# Altium PCB PCB1.PcbDoc
Units mil, origin at the board's own origin, x right, y up, seen from the top; angles counter-clockwise.
Board outline 2094 x 1900 mil, 2 copper layers (Top Layer, Bottom Layer), stack 60.4 mil thick; 17 components, 15 nets, 79 pads, 9 vias.
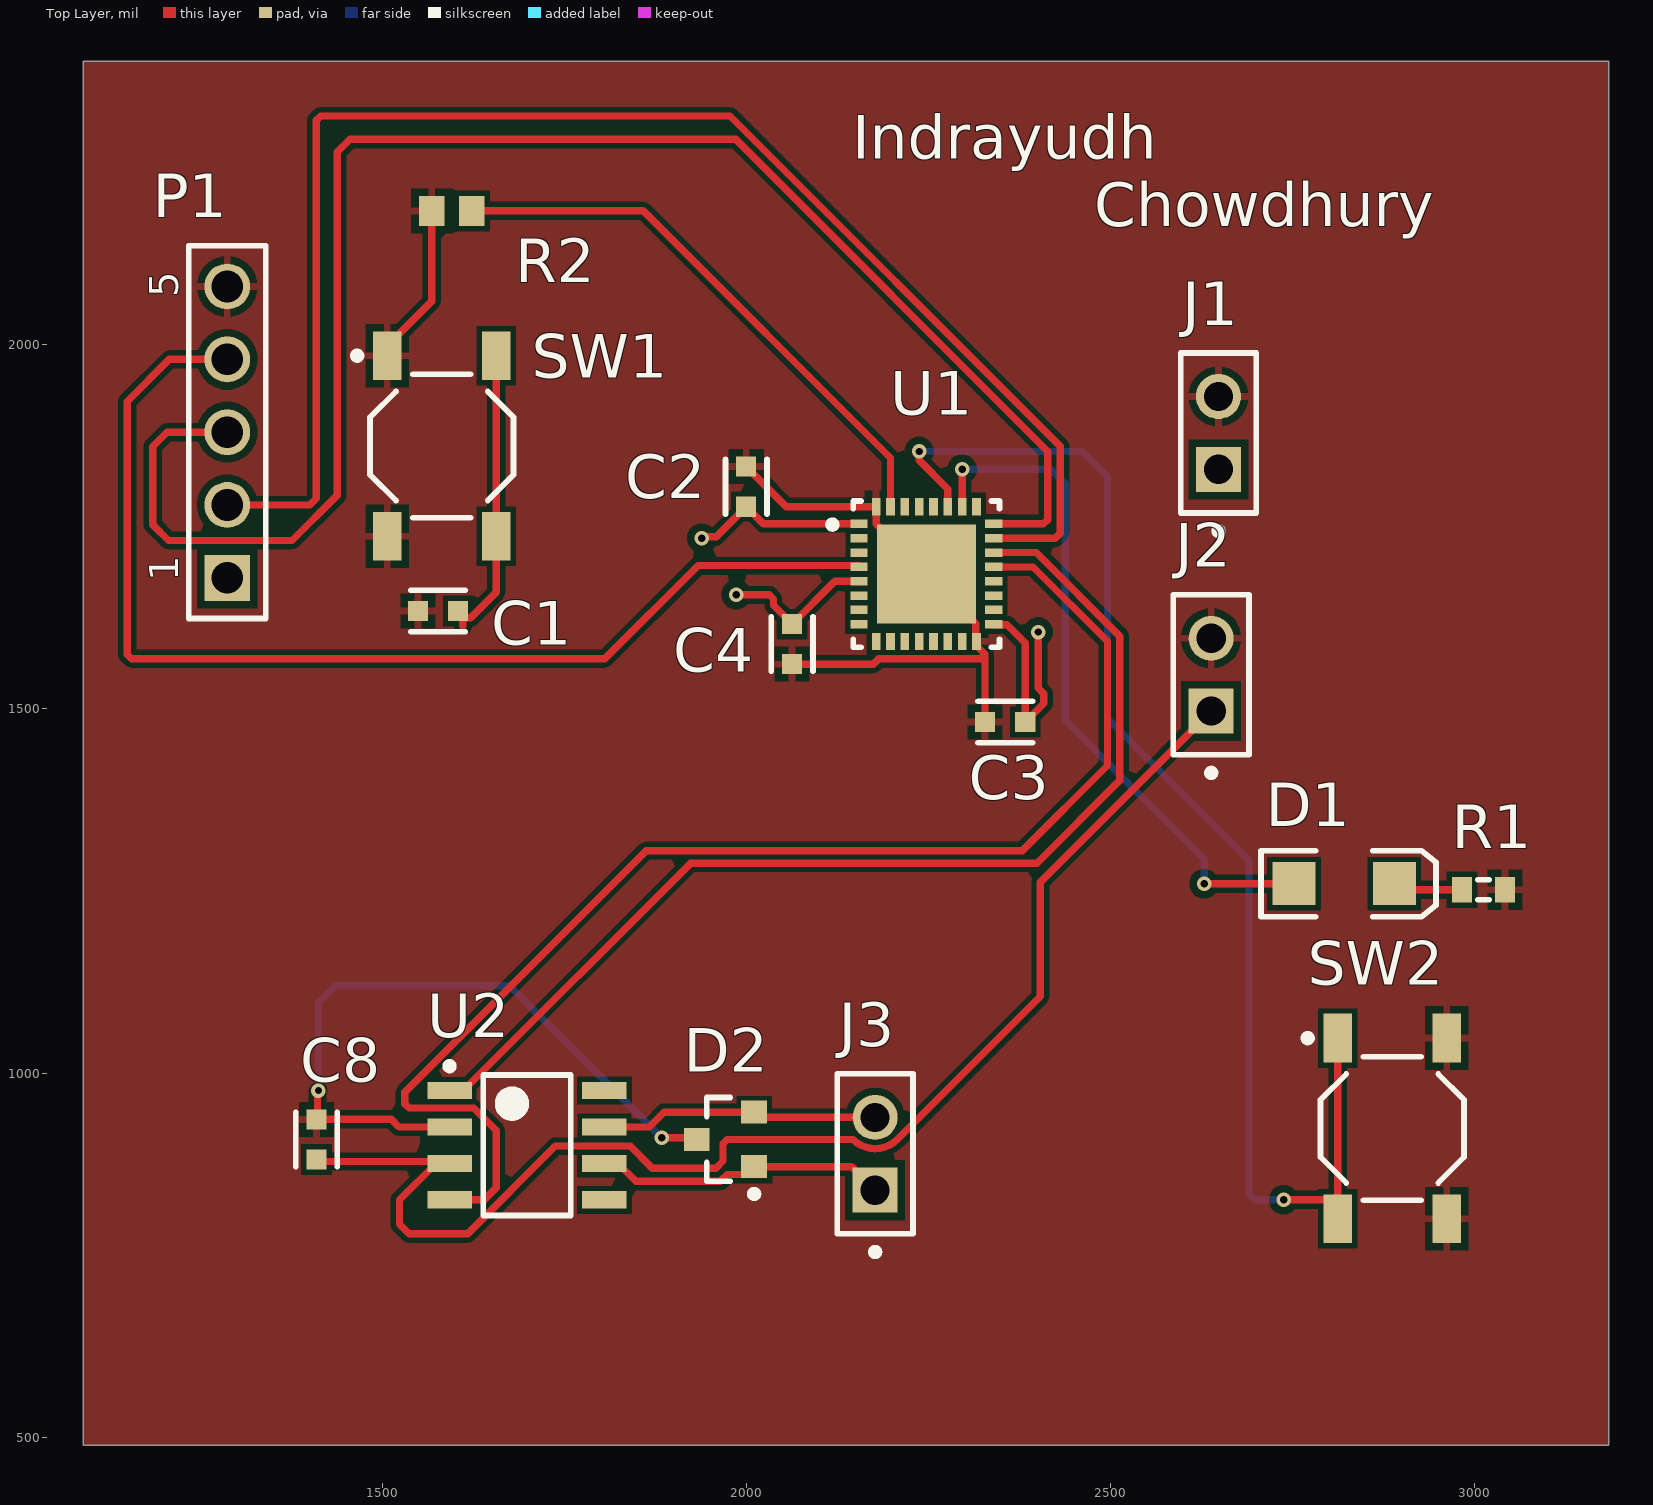
[diagram p0: Top Layer view]
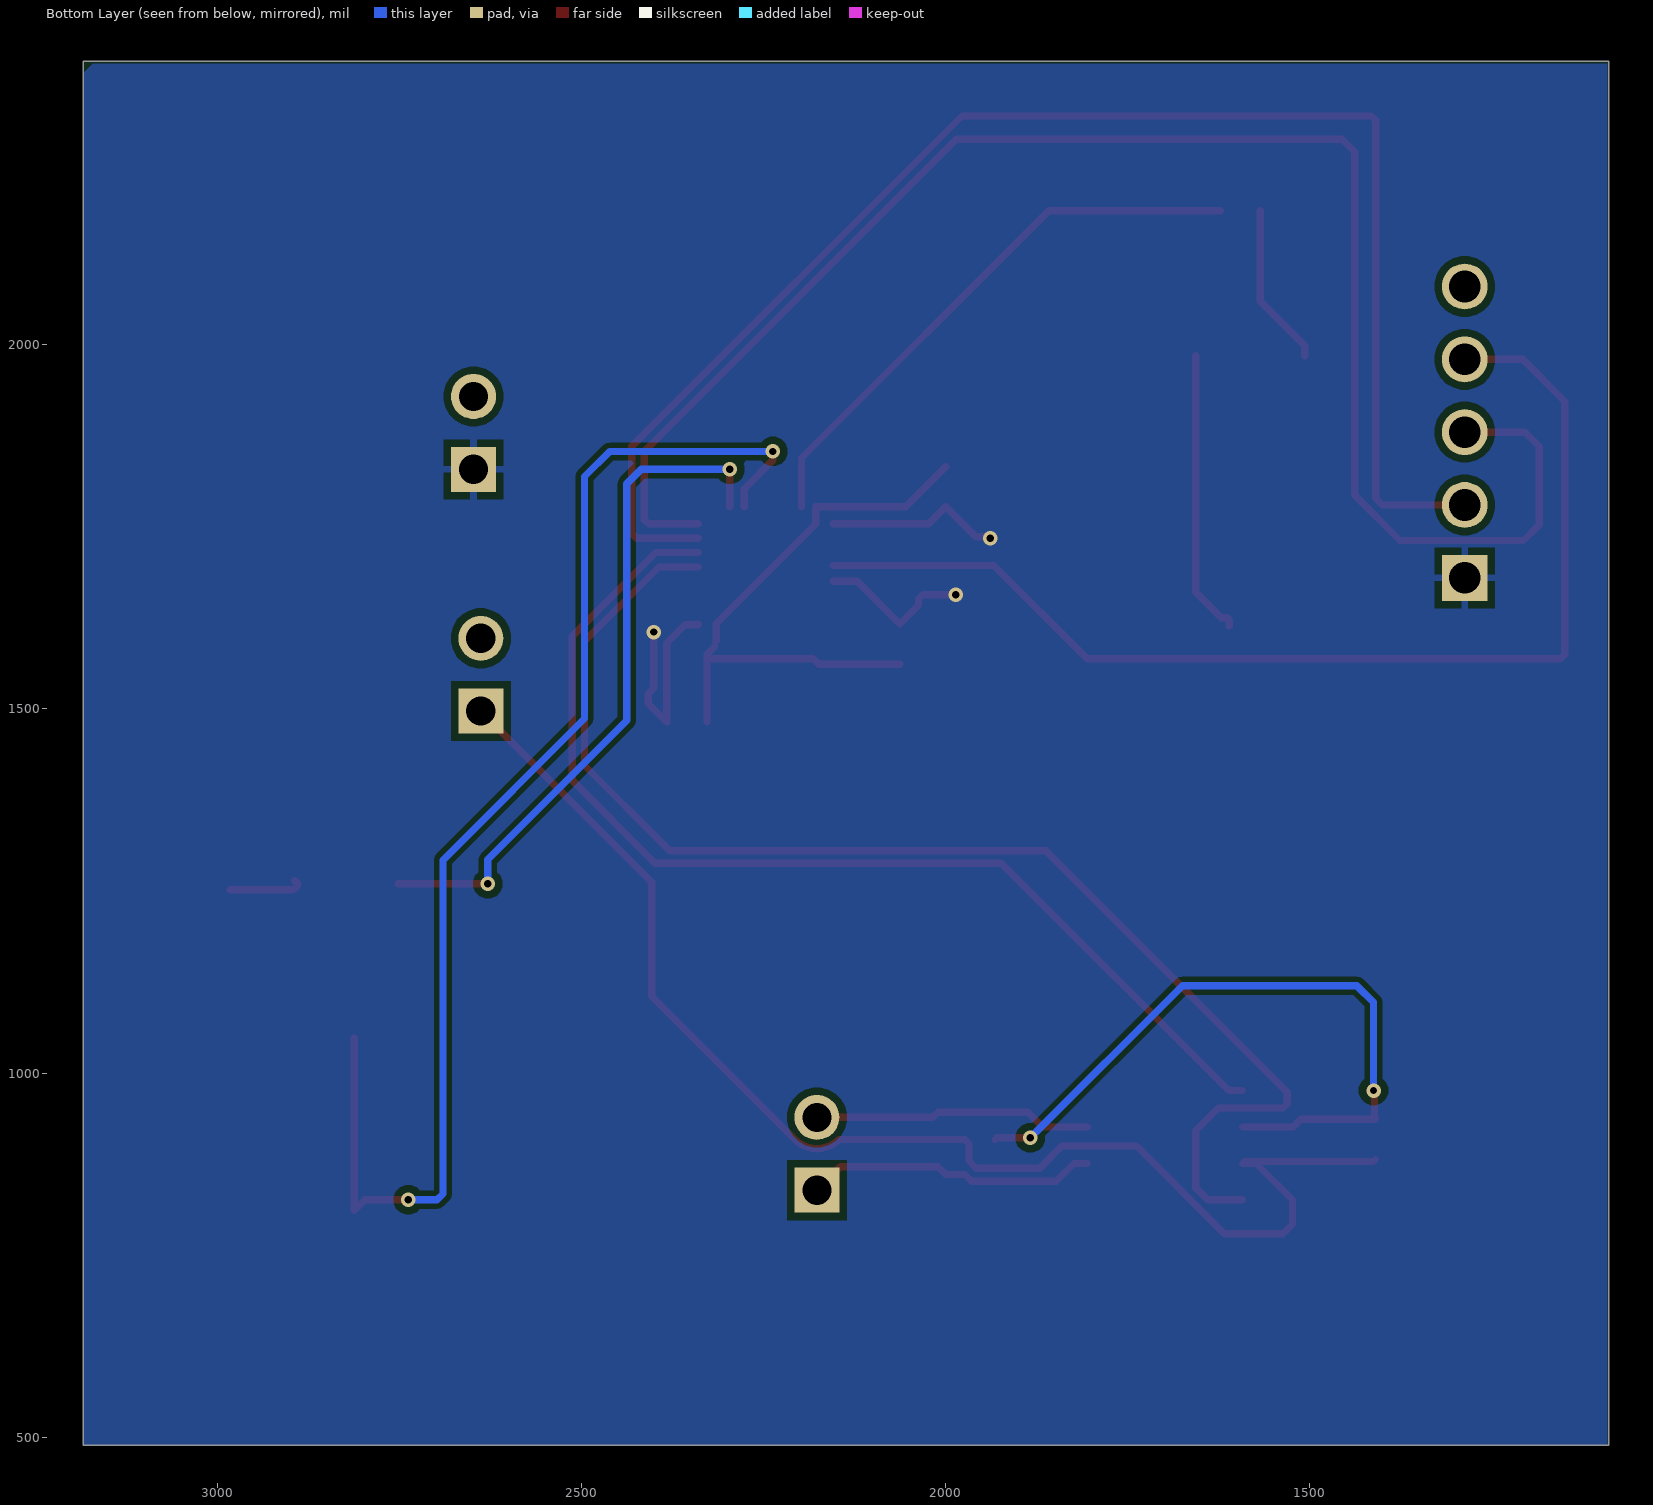
[diagram p1: Bottom Layer view, seen from below]
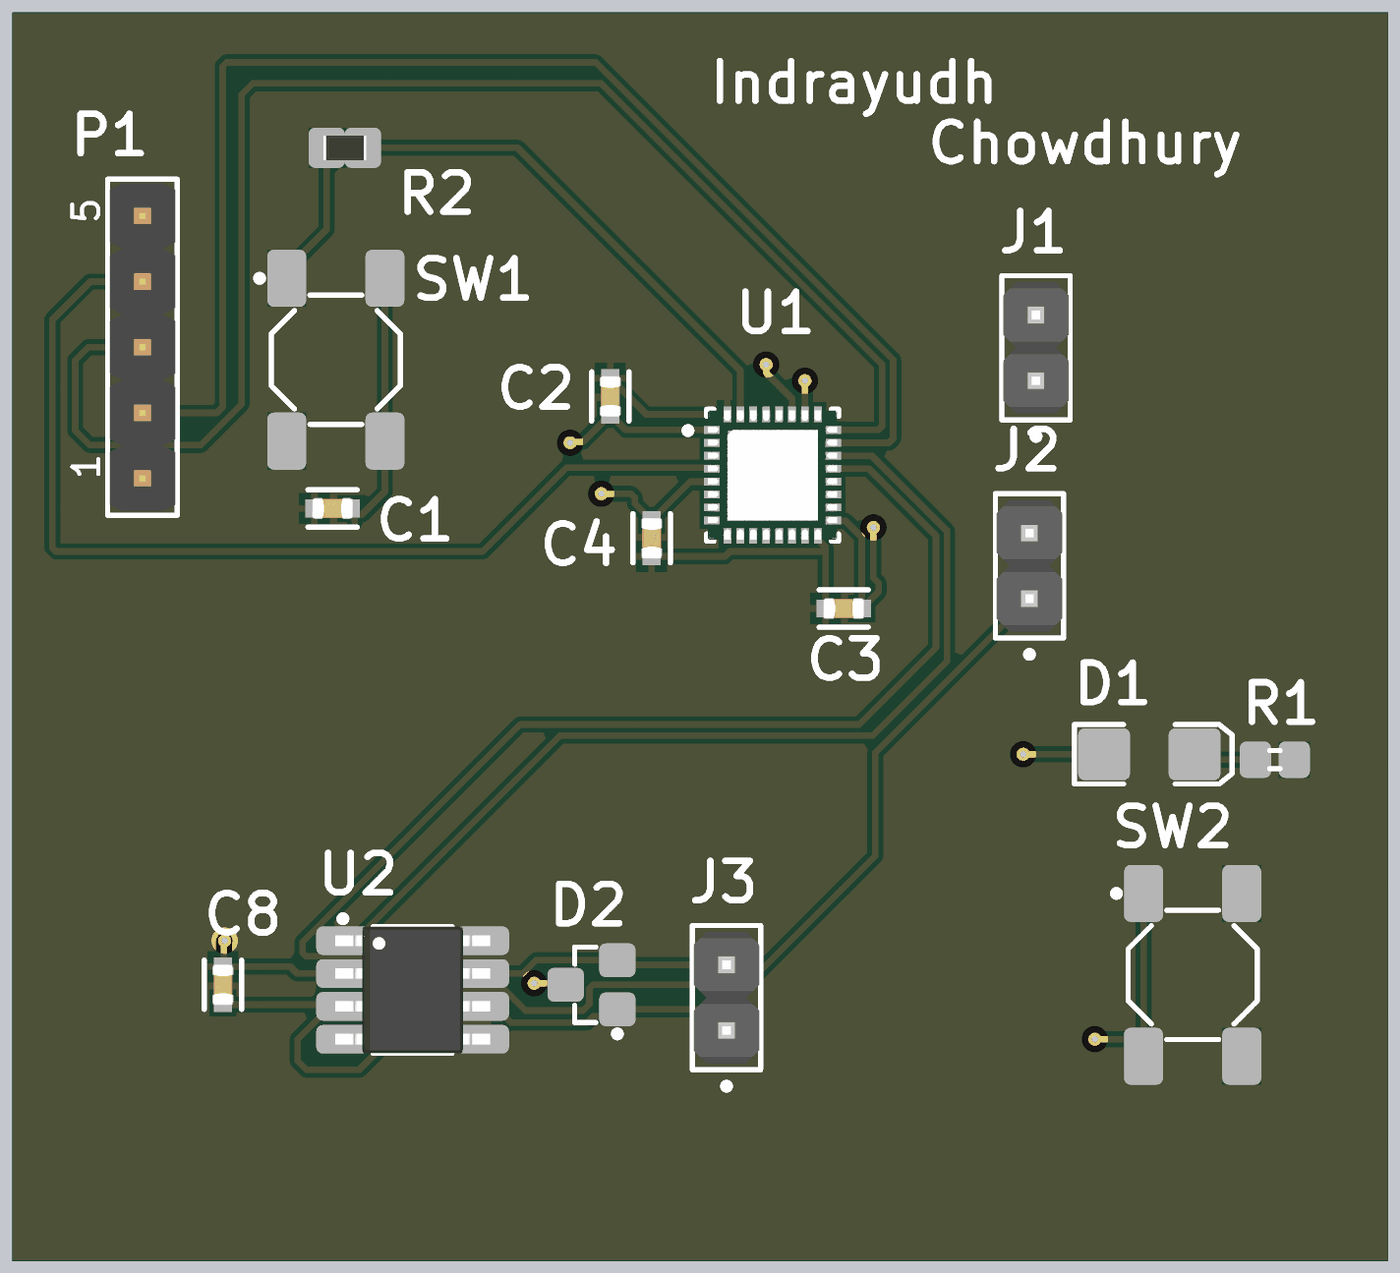
[diagram p2: 3D render of the assembled board from above, using the file's embedded part models]

## Layer stack, top to bottom
Top Solder: solder mask 0.5, Solder Resist, Dk 3.3
Top Layer: signal copper 0.7
Dielectric1: core 59, FR-4, Dk 4.3
Bottom Layer: signal copper 0.7
Bottom Solder: solder mask 0.5, Solder Resist, Dk 3.3

## Board outline
1090,489 3184,489 3184,2389 1090,2389

## Design rules (kind name [scope] priority, off if disabled: settings)
Clearance [All] p1: gap=7 ignorepadtopadclearanceinfootprint=FALSE except(0: Arc-Hole Track-Hole SMDPad-Hole THPad-Hole Via-Hole Fill-Hole Poly-Hole Region-Hole Text-Hole; 10: THPad-THPad THPad-Via THPad-Fill THPad-Poly THPad-Region THPad-Text Via-Via Via-Fill Via-Poly Via-Region Via-Text Fill-Fill Fill-Poly Fill-Region Fill-Text Poly-Poly Poly-Region Poly-Text Region-Region Region-Text Text-Text)
DiffPairsRouting [All] p1: maxlimit=10 minlimit=10 mostfreqgap=10 toplayer_minwidth=10 toplayer_maxwidth=10 toplayer_prefwidth=10 bottomlayer_minwidth=10 bottomlayer_maxwidth=10 bottomlayer_prefwidth=10 maxuncoupledlength=500
HoleSize [All] p1: absolutevalues=TRUE maxlimit=300 minlimit=10 maxpercent=80.000 minpercent=20.000
MinimumAnnularRing [All] p1: minimumring=10
PasteMaskExpansion [All] p1: expansion=10
PlaneClearance [All] p1: clearance=15
PlaneConnect [All] p1: pad.planeconnectstyle=Relief pad.reliefexpansion=20 pad.reliefentries=4 pad.reliefconductorwidth=10 pad.reliefairgap=10 via.planeconnectstyle=Direct via.reliefexpansion=20 via.reliefentries=4 via.reliefconductorwidth=10 via.reliefairgap=10
PolygonConnect [All] p1: thpad.connectstyle=Relief thpad.reliefconductorwidth=10 thpad.reliefentries=4 thpad.polygonreliefangle="90 Angle" thpad.airgapwidth=10 smdpad.connectstyle=Relief smdpad.reliefconductorwidth=10 smdpad.reliefentries=4 smdpad.polygonreliefangle="90 Angle" smdpad.airgapwidth=10 via.connectstyle=Direct via.reliefconductorwidth=10 via.reliefentries=4 via.polygonreliefangle="90 Angle" via.airgapwidth=10
RoutingVias [All] p1: holewidth=10 width=20 viastyle="Through Hole" minholewidth=10 minwidth=20 maxholewidth=10 maxwidth=20
SMDNeckDown [All] p1: percent=100.000
SilkToSolderMaskClearance SilkscreenOverComponentPads [IsPad] p1: minsilkscreentomaskgap=10 clearancetoexposedcopper=TRUE
SolderMaskExpansion [All] p1: expansion=10 istentingtop=FALSE
Width [All] p1: maxlimit=10 minlimit=10 preferedwidth=10
24 further rules are at their usual default settings.

## Components (designator, comment, footprint, x,y, rotation, side; value= is the part's Value field where it differs from the comment)
C1 "100nF" FP-CGA3E-0_3-0_1-MFG 1576.97,1634.4 r0 top
C2 "100nF" FP-CGA3E-0_3-0_1-MFG 1999.98,1805.12 r90 top
C3 "100nF" FP-CGA3E-0_3-0_1-MFG 2355.51,1481.99 r180 top
C4 "100nF" FP-CGA3E-0_3-0_1-MFG 2063,1589 r270 top
C8 "100nF" FP-CGA3E-0_3-0_1-MFG 1410,908.87 r90 top
D1 "LED2" 3.2X1.6X1.1 2821,1260 r0 top
D2 "NUP2105LT1G" ONSC-SOT-23-3-318-08_V 1971.44,908.87 r180 top
J1 "2 pin header" FP-M20-9990246-MFG 2648.44,1879 r90 top
J2 "2 pin header" FP-M20-9990246-MFG 2638.43,1547 r90 top
J3 "2 pin header" FP-M20-9990246-MFG 2176.98,889.19 r90 top
P1 "5 pin header" 61300511121 1287.44,1880 r90 top
R1 "Res3" J1-0603 3012.17,1251.76 r0 top value=1K
R2 "10k" RESC1609X50X30ML8T20 1595.67,2183.84 r0 top
SW1 "TL3342F160QG" ESWI-TL3342F160QG_V 1582,1861 r0 top
SW2 "TL3342F160QG" ESWI-TL3342F160QG_V 2887,924 r0 top
U1 "STM32L432KCU6" FP-UFQFPN32-A0B8-MFG 2247.24,1685.16 r0 top
U2 "MCP2551-I/SN" MCHP-SN8_V 1699,901 r0 top

## Footprints (in the part's own frame and the unit in brackets; to place one, negate y for a bottom-side part, rotate by r counter-clockwise, add the part's x,y. Pads: shape width x height; smd on the part's side, far side on the other; paste and mask are expansions set on the pad)
3.2X1.6X1.1 [mm] "SMT LED; 2 Flat Leads"
  rect 1.5x1.5 smd: 1(-1.75,0) 2(1.75,0)
  silkscreen extent -2.9,-1.15 3.2,1.15
61300511121 [mm] "Pin Header, pitch 2.54 mm, THT, Vertical, single row, 5p"
  rect 1.6x1.6 hole 1.1: 1(-5.08,0)
  round 1.6 hole 1.1: 2(-2.54,0) 3(0,0) 4(2.54,0) 5(5.08,0)
  silkscreen extent -6.5,-1.35 6.5,1.35, body extent -6.35,-1.27 6.35,1.27, height 8.57
ESWI-TL3342F160QG_V [mm] "SMD, 4-Leads, Body 5x5mm, Pitch 6.3mm"
  rect 1x1.7 smd: 1(-1.9,3.15) 2(-1.9,-3.15) 3(1.9,3.15) 4(1.9,-3.15)
  silkscreen extent -3.07,-2.5 2.5,3.27, body extent -2.5,-2.5 2.5,2.5, height 1.5
FP-CGA3E-0_3-0_1-MFG [mm]
  rect 0.7x0.7 smd paste+0 mask+0: 1(-0.7,0) 2(0.7,0)
  silkscreen extent -0.95,-0.72 0.95,0.72, body extent -1.15,-0.65 1.15,0.65, height 0.25
FP-M20-9990246-MFG [mm]
  rect 1.57x1.57 hole 1.02 paste-1000 mask+0: 1(-1.27,0)
  round 1.57 hole 1.02 paste-1000 mask+0: 2(1.27,0)
  silkscreen extent -3.55,-1.32 2.79,1.32, body extent -2.89,-1.42 2.89,1.42, height 0.25
FP-UFQFPN32-A0B8-MFG [mm]
  rect 0.6x0.3 smd paste+0 mask+0: 1(-2.35,1.75) 2(-2.35,1.25) 3(-2.35,0.75) 4(-2.35,0.25) 5(-2.35,-0.25) 6(-2.35,-0.75) 7(-2.35,-1.25) 8(-2.35,-1.75) 17(2.35,-1.75) 18(2.35,-1.25) 19(2.35,-0.75) 20(2.35,-0.25) 21(2.35,0.25) 22(2.35,0.75) 23(2.35,1.25) 24(2.35,1.75)
  rect 0.3x0.6 smd paste+0 mask+0: 9(-1.75,-2.35) 10(-1.25,-2.35) 11(-0.75,-2.35) 12(-0.25,-2.35) 13(0.25,-2.35) 14(0.75,-2.35) 15(1.25,-2.35) 16(1.75,-2.35) 25(1.75,2.35) 26(1.25,2.35) 27(0.75,2.35) 28(0.25,2.35) 29(-0.25,2.35) 30(-0.75,2.35) 31(-1.25,2.35) 32(-1.75,2.35)
  rect 3.45x3.45 smd paste+0 mask+0: 33(0,0)
  silkscreen extent -3.4,-2.55 2.55,2.55, body extent -2.75,-2.75 2.75,2.75, height 0.25
J1-0603 [mm] "Chip Resistor, Body 1.6x0.8mm, IPC High Density"
  rect 0.7x0.9 smd: 1(-0.75,0) 2(0.75,0)
  silkscreen extent -0.2,-0.35 0.2,0.35, body extent -0.85,-0.48 0.85,0.48, height 0.9
MCHP-SN8_V [mm] "SOIC, 8-Leads, Body 4.9x3.9mm, Pitch 1.27mm"
  rect 1.55x0.6 smd: 1(-2.7,1.905) 2(-2.7,0.635) 3(-2.7,-0.635) 4(-2.7,-1.905) 5(2.7,-1.905) 6(2.7,-0.635) 7(2.7,0.635) 8(2.7,1.905)
  silkscreen extent -2.82,-2.45 1.53,2.88, body extent -3,-2.45 3,2.45, height 1.75
ONSC-SOT-23-3-318-08_V [mm] "SOT23, 3-Leads, Body 2.92x1.3mm, Pitch 0.95mm"
  rect 0.9x0.8 smd: 1(-1,0.95) 2(-1,-0.95) 3(1,0)
  silkscreen extent -1.13,-1.46 0.65,2.02, body extent -0.65,-1.46 0.65,1.46, height 1.11
RESC1609X50X30ML8T20 [mm] "Chip Resistor, 2-Leads, Body 1.65x0.95mm, IPC Low Density"
  rect 0.9x1.05 smd: 1(-0.7,0) 2(0.7,0)
  body extent -0.82,-0.48 0.82,0.48, height 0.5

## Part data
C1 C2 C3 C4 C8: library part CMP-001-00083-2, "CGA Series 0603 100 nF 50 V ±10 % Tolerance X7R SMT Multilayer Ceramic Capacitor 100nf"
D1: library part CMP-062-000002-1, "Typical RED, GREEN, YELLOW, AMBER GaAs LED", Design Item ID=LED2, LatestRevisionDate=17-Jul-2002, LatestRevisionNote="Re-released for DXP Platform.", PackageDescription="SM LED; 2 Flat Leads", PackageReference=3.2X1.6X1.1, PackageVersion=Feb-2002, Published=8-Jun-2000, Publisher="Altium Limited", Source="Miscellaneous Devices.SchLib"
D2: library part CMP-004-00032-1, "NUP2105L Series 350 W Dual Line CAN Bus Protector ESD Protection Diode - SOT-23"
J1 J2 J3: library part CMP-002-00096-1, "2.54mm (0.1\") Pitch SIL Vertical PC Tail Pin Header, 6.1mm mating pin height, tin, 2 contacts"
P1: library part CMP-002-00095-1, "THT Vertical Pin Header WR-PHD, Pitch 2.54 mm, Single Row, 5 pins"
R1: library part CMP-063-000002-1, "Resistor", Design Item ID=Res3, LatestRevisionDate=29-May-2009, LatestRevisionNote="IPC-7351 Footprint Added.", PackageDescription="Chip Resistor", PackageReference=J1-0603, Published=8-Jun-2000, Publisher="Altium Limited", Source="Miscellaneous Devices.SchLib", Type=Resistor
R2: library part CMP-009-00178-3, "Res Thick Film 0603 10K Ohm 1% 1/10W ±100ppm/°C Molded SMD Paper T/R"
SW1 SW2: library part CMP-00005-1, "Switch Tactile N.O. SPST Round Button Gull Wing 0.05A 12VDC 100000Cycles 1.57N SMD T/R"
U1: library part CMP-020-00023-1, "MCU 32-bit Ultra Low Power STM32L ARM Cortex-M4 RISC 256kB Flash 32-Pin QFN ECOPACK2 Tray"
U2: library part CMP-015-00008-1, "MCP2551 Series 5V 1 Mb/s Surface Mount High-Speed CAN Transceiver - SOIC-8"

## Via types
v1: diameter 20, hole 10, Top Layer to Bottom Layer, 9 vias

## Nets (pads, with @x,y where several pads share a name; then routed paths per layer and width w, separated by ;. In a path a pad name is that pad's centre, name@x,y a point inside that pad or via, vN(x,y) a via of type N, cw(c..) or ccw(c..) an arc to the next point about the centre after c; other vN are vias at no path point)
3.3V: C2.1 C3.1 C4.1 J1.1 P1.1 U1.1 U1.5 U1.17 | length 759.5
  Top Layer w10: v1(1938.76,1734.37) 1940.67,1736.28 1958.71,1736.28 C2.1 2023.49,1754.05 U1.1 U1.1@2153.82,1753.15 ; v1(1986.25,1656.84) 2031.55,1656.84 2037.41,1650.98 2037.41,1642.15 C4.1 2121.76,1675.31 U1.5 ; U1.17 2340.39,1615.64 2358.07,1615.64 2383.07,1590.64 C3.1 2408.67,1507.59 2408.67,1520.71 2400.79,1528.59 v1(2400.79,1605.55)
5V: C8.1 J2.1 U2.3 | length 1862.7
  Top Layer w10: C8.1 1412.66,878.66 1590.04,878.66 U2.3 1574,876 1524,826 1524,792.35 1537,779.35 1617.53,779.35 1738,899.81 1840.78,899.81 1871.09,869.5 1958.41,869.5 1968.25,879.35 1968.25,903.02 1974.11,908.87 2146.62,908.87 ccw(c2176.98,939.19) 2207.37,908.9 2403.64,1105.17 2403.64,1262.21 J2.1
GND: C1.1 C2.2 C3.2 C4.2 C8.2 D2.3 J1.2 J2.2 P1.5 R1.2 R2.1 SW1.1 SW1.2 SW2.3 SW2.4 U1.16 U1.32 U1.33 U2.2 | length 2011.4
  Top Layer w10: v1(1412.66,976) 1411.33,974.67 1411.33,937.76 C8.2 1512.68,936.43 1523.12,926 U2.2 ; SW1.1 1507.2,1998.79 1568.11,2059.71 R2.1 ; v1(1884,911.11) 1929.83,911.11 D2.3 ; C2.2 2054.98,1777.68 U1.32 2178.54,1777.49 2178.54,1753.87 U1.33 2315.24,1617.16 2315.24,1593.54 U1.16 ; C4.2 2174.52,1561.44 2181.9,1568.83 2321.86,1568.83 2327.95,1574.92 ; U1.16@2317.05,1585.83 2327.95,1574.92 ; C3.2 2327.95,1574.92
  Bottom Layer w10: v1(1412.66,976) 1412.66,1097.11 1435.54,1120 1675.11,1120 v1(1884,911.11)
NetC1_2: C1.2 SW1.3 SW1.4 | length 394.7
  Top Layer w10: 1610.88,1614.2 1610.88,1622.58 1613.31,1625 1621.69,1625 1656.8,1660.12 SW1.4 SW1.3
NetD1_1: D1.1 U1.26 | length 952.7
  Top Layer w10: U1.26 v1(2296.46,1829) ; v1(2628.76,1260) D1.1
  Bottom Layer w10: v1(2296.46,1829) 2418.28,1829 2438,1809.28 2438,1484.11 2628.76,1293.36 v1(2628.76,1260)
NetD1_2: D1.2 R1.1 | length 103.1
  Top Layer w10: D1.2@2893.9,1264 D1.2 ccw(c2898.13,1260) 2898.13,1251.77 R1.1
NetD2_1: D2.1 J3.1 U2.6 | length 403.6
  Top Layer w10: U2.6 1824,876 1848.61,851.39 1964.34,851.39 1973.67,860.72 2000.06,860.72 D2.1 2144.7,871.47 J3.1
NetD2_2: D2.2 J3.2 U2.7 | length 383
  Top Layer w10: U2.7 1866.91,926 1887.19,946.28 D2.2 2017.9,939.19 J3.2
NetP1_2: P1.2 U1.23 | length 2070.1
  Top Layer w10: P1.2 1400.55,1780 1409.56,1789.01 1409.56,2308.14 1415.42,2314 1977.6,2314 2431,1860.6 2431,1741.23 2424.14,1734.37 U1.23
NetP1_3: P1.3 U1.24 | length 2307.9
  Top Layer w10: P1.3 1204.68,1880 1185,1860.31 1185,1753 1206.86,1731.14 1376.26,1731.14 1438.54,1793.42 1438.54,2264.54 1456,2282 1985.56,2282 2414,1853.56 2414,1759.91 2408.14,1754.05 U1.24
NetP1_4: P1.4 U1.4 | length 1568.7
  Top Layer w10: P1.4 1208,1980 1150,1922 1150,1574.86 1155.86,1569 1805.91,1569 1933.69,1696.78 U1.4@2154.72,1696.78
NetR2_2: R2.2 U1.31 | length 782.2
  Top Layer w10: R2.2 1858.68,2183.84 2198.03,1844.49 U1.31
NetSW2_1: SW2.1 SW2.2 U1.27 | length 1798.5
  Top Layer w10: v1(2237.4,1853.56) 2237.4,1841.31 2276.77,1801.94 U1.27 ; v1(2738,826) 2797.51,826 2812.2,811.31 SW2.1
  Bottom Layer w10: v1(2237.4,1853.56) 2461.44,1853.56 2496,1819 2496,1486.82 2690.4,1292.42 2690.4,834.07 2698.47,826 v1(2738,826)
NetU1_21: U1.21 U2.4 | length 1825.8
  Top Layer w10: U2.4 1640.14,826 1656.8,842.66 1656.8,921.19 1625.81,952.19 1537.05,952.19 1531.19,958.05 1531.19,973.78 1862.68,1305.28 2378.97,1305.28 2496,1422.3 2496,1592.77 2393.77,1695 U1.21
NetU1_22: U1.22 U2.1 | length 1515.4
  Top Layer w10: U2.1 1611.4,976 1923.68,1288.28 2399.28,1288.28 2513,1402 2513,1599.81 2398.12,1714.68 U1.22
pads on no net: U1.2 U1.3 U1.6 U1.7 U1.8 U1.9 U1.10 U1.11 U1.12 U1.13 U1.14 U1.15 U1.18 U1.19 U1.20 U1.25 U1.28 U1.29 U1.30 U2.5 U2.8

## Polygon pours and split planes (outlines as drawn)
GND on Top Layer "GND_L01_P000" (solid, pour order 0): 1090,2389 3184,2389 3184,489 1090,489
3.3V on Bottom Layer "3.3V_L02_P001" (solid, pour order 1): 1091.59,2386 3171,2386 3184,2373 3184,489 1091.59,489 1091.59,1531

## Silkscreen, mask and mechanical layers (free items; w line width, h text height)
Top Overlay:
  text "Indrayudh" at 2145.91,2255.17 h60
  text "Chowdhury" at 2478,2162.99 h60

## Text inside footprints (layer, text, board x,y; h text height)
P1: Top Overlay "5" at 1220.51,2065.04 h40 r90; Top Overlay "1" at 1220.51,1675.28 h40 r90